# EAGLE board PCB_TGI_V9_2D (EAGLE 9.7.0)
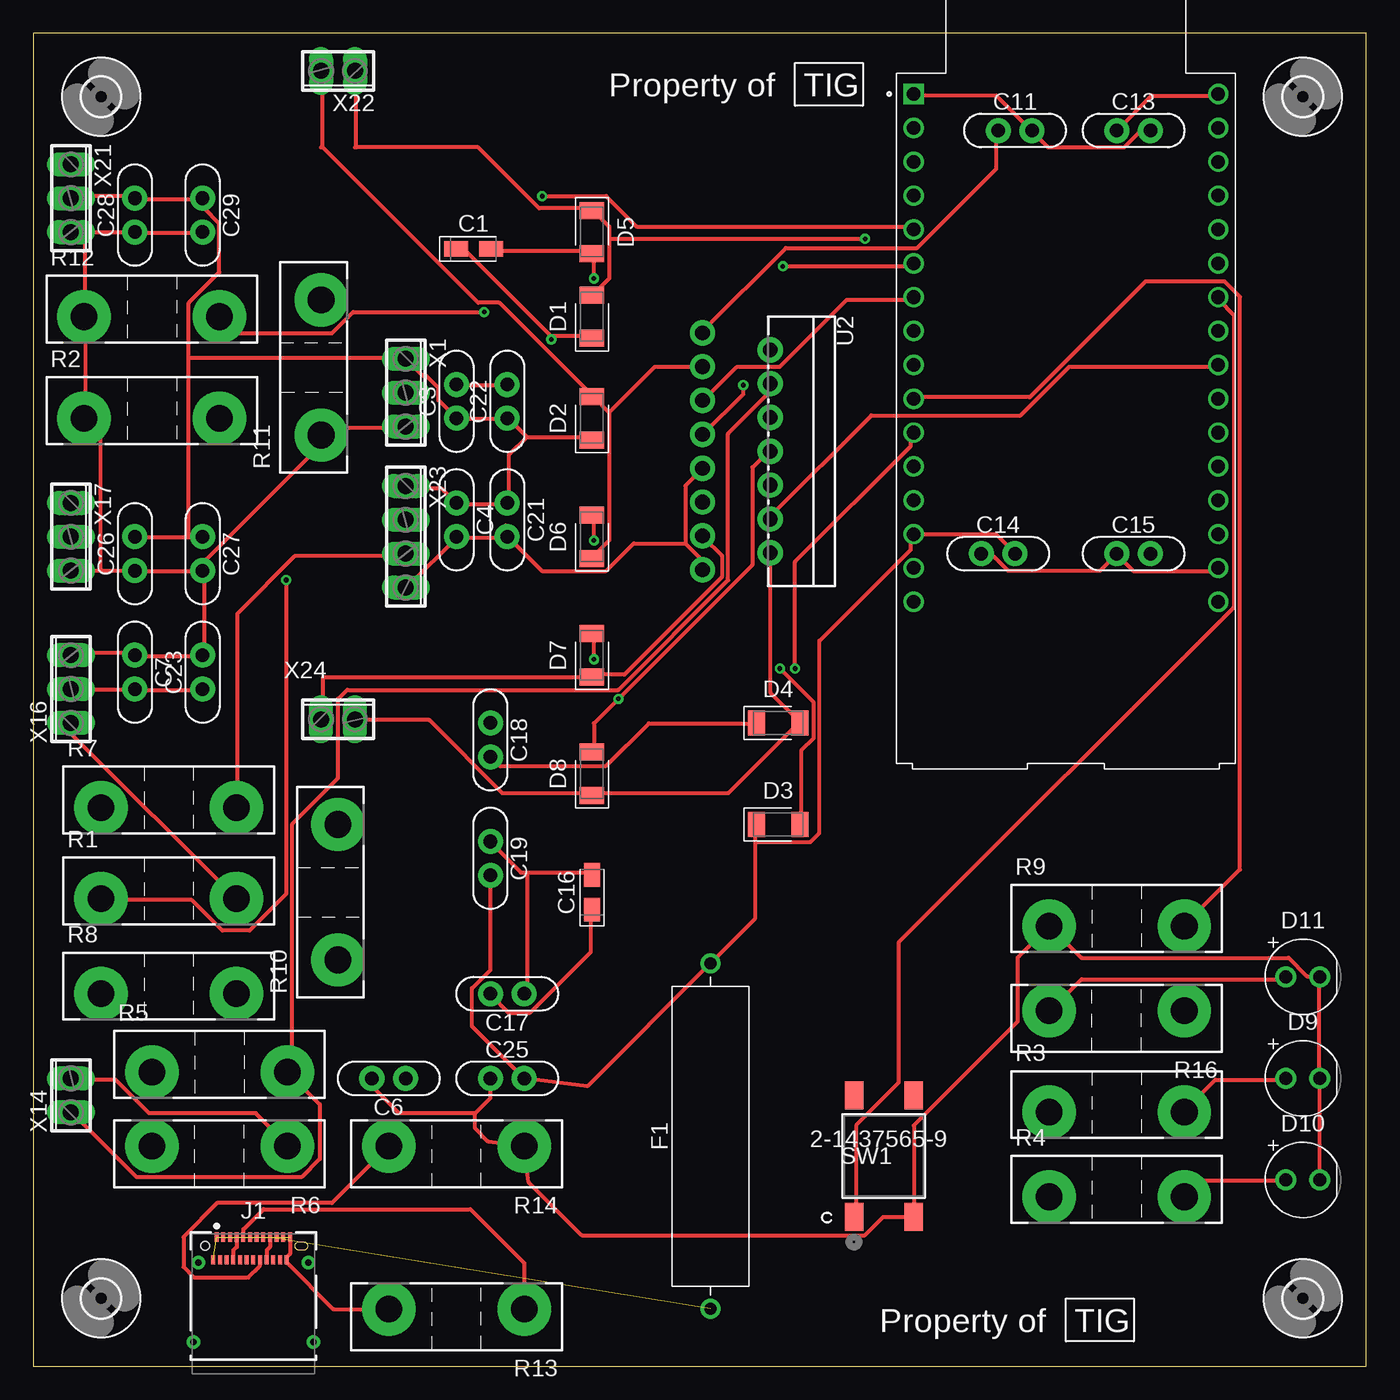
[diagram p0: board, top side]
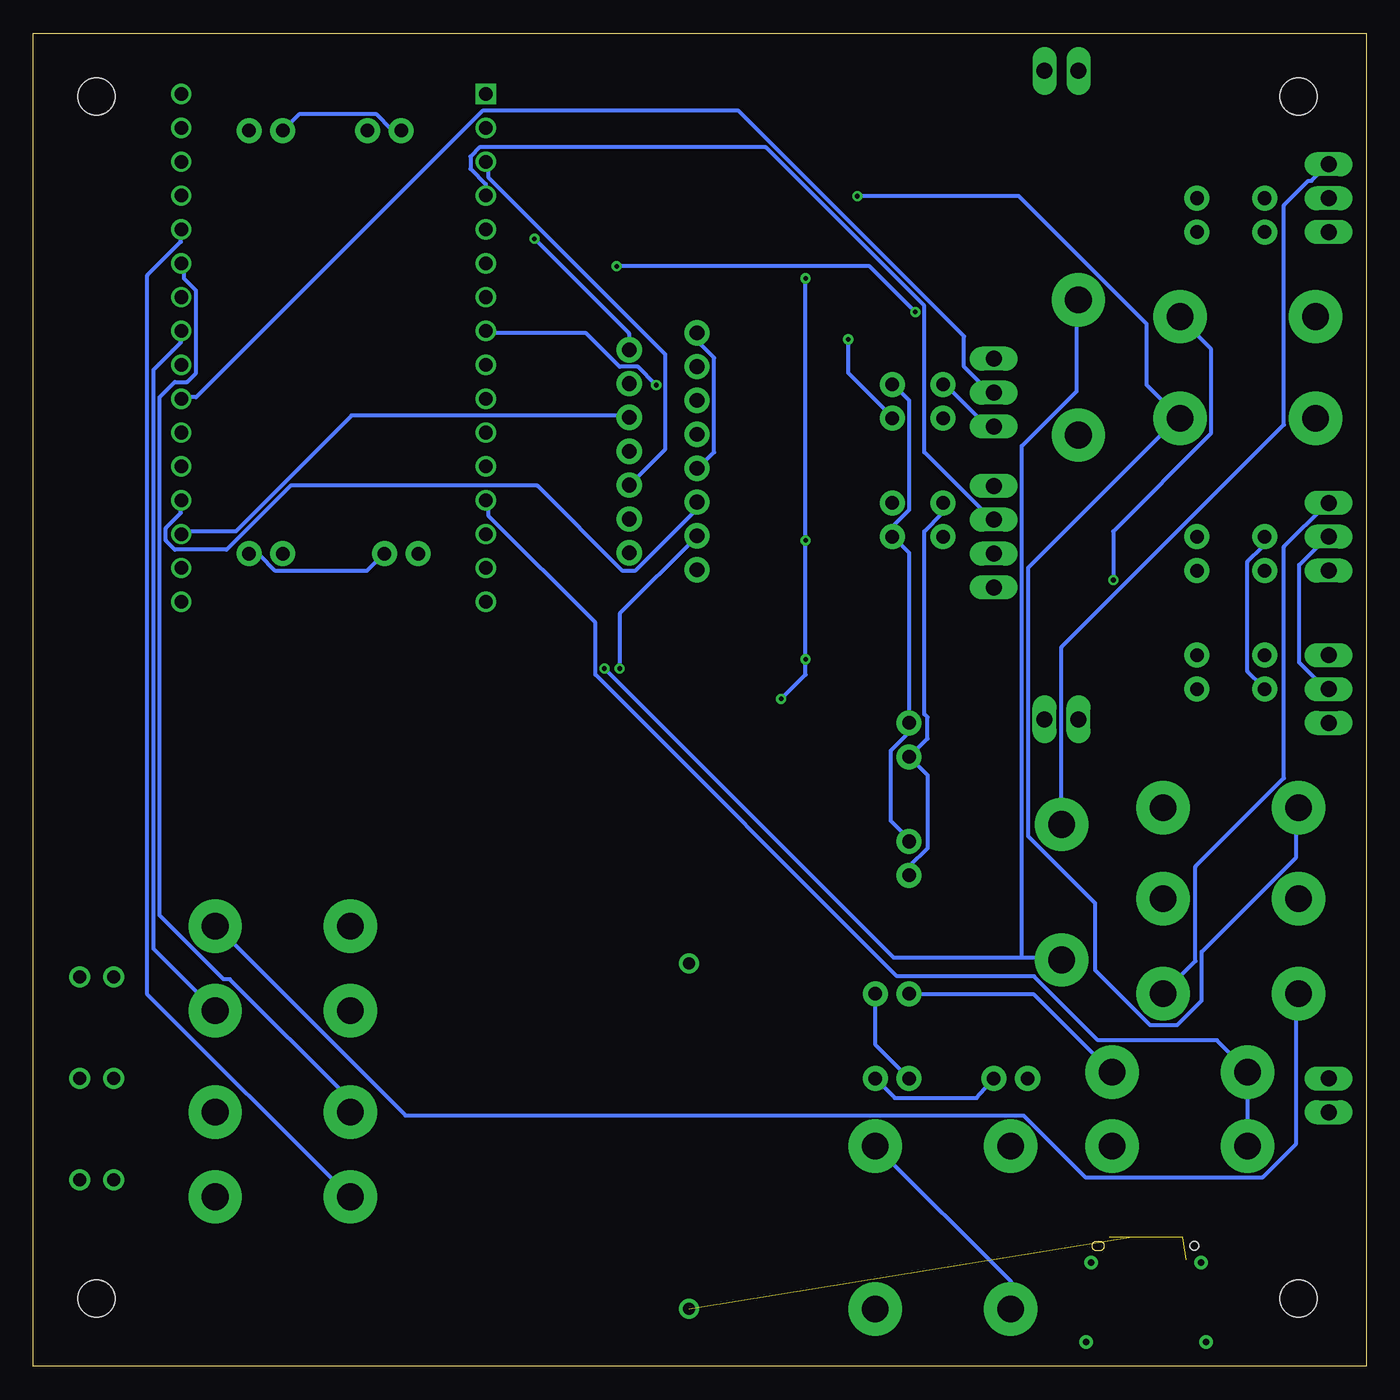
[diagram p1: board, bottom side, seen from below]

Size 100 x 100 mm. Coordinates in mm from the lower left corner, seen from the top.
Outline: 0,0 100,0 100,100 0,100 0,0
Copper layers (1*16): Top / Bottom
Stack-up Default Layer Stack: Top SilkScreen Epoxy Ink / Top SolderMask SR:Green 0.0254mm Dk 4.3 / Top Surface Finish Lead-Free 0.02mm / Top CuFoil:007 0.035mm / Dielectric-1 User Defined 1.5mm / Bottom CuFoil:007 0.035mm / Bottom Surface Finish Lead-Free 0.02mm / Bottom SolderMask SR:Green 0.0254mm Dk 4.3 / Bottom SilkScreen Epoxy Ink
Design rules: minimum copper width 12mil, minimum drill size 0.35mm, copper clearance wire_polygon to wire_polygon 6mil, copper clearance wire_polygon to pad_smd 6mil, copper clearance wire_polygon to via 6mil, copper clearance pad_smd to pad_smd 6mil, copper clearance pad_smd to via 6mil, copper clearance via to via 6mil, copper clearance smd to pad (same net) 6mil, copper clearance smd to via (same net) 6mil, copper clearance smd to smd (same net) 6mil, dimension clearance 40mil, via restrict clearance 0mil, restrict clearance 0mil, drill distance 6mil, keepout clearance 0mil

## Footprints (pad centres in the part's own frame; a part is rotated, then mirrored left to right if it is on the bottom)
CAPMP3216X180N = smd 1.796 x 1.189: 1 -1.31,0; 2 1.31,0
CAP-THRU-2.54MM = drill 1.016 pad 1.88: 1 -1.27,0; 2 1.27,0
DIOMELF3516 = smd 1.275 x 1.85: 1 -1.62,0; 2 1.62,0
LEDRD254W60D565H860B_W = drill 0.981 pad 1.581: 1 -1.27,0; 2 1.27,0
FUSAD2590W70L2150D550B = drill 0.9 pad 1.5: 1 -12.95,0; 2 12.95,0
2,8 = hole 2.8: 0,0
12401832E402A = smd 0.3 x 0.7: A1 -2.75,5; A2 -2.25,5; A3 -1.75,5; A4 -1.25,5; A5 -0.75,5; A6 -0.25,5; A7 0.25,5; A8 0.75,5; A9 1.25,5; A10 1.75,5; A11 2.25,5; A12 2.75,5; B1 2.5,3.3; B2 2,3.3; B3 1.5,3.3; B4 1,3.3; B5 0.5,3.3; B6 0,3.3; B7 -0.5,3.3; B8 -1,3.3; B9 -1.5,3.3; B10 -2,3.3; B11 -2.5,3.3; B12 -3,3.3 | drill 0.5 slot 1.1 rotated 90: SH1 -4.13,3.09; SH2 4.13,3.09; SH3 4.49,-2.86; SH4 -4.49,-2.86 | hole 0.65: -3.6,4.34
TO-247-2V = drill 2 pad 4: 1 -5.08,0; 2 5.08,0
SW4_2-1437565-7 = smd 1.397 x 2.108: 1 -4.46,-9.1; 2 -4.46,0; 3 0,-9.1; 4 0,0
MODULE_ESP32-C6-DEVKITC-1-N8 = drill 1.016 square: J1_1 -11.43,24.325 | drill 1.016: J1_2 -11.43,21.785; J1_3 -11.43,19.245; J1_4 -11.43,16.705; J1_5 -11.43,14.165; J1_6 -11.43,11.625; J1_7 -11.43,9.085; J1_8 -11.43,6.545; J1_9 -11.43,4.005; J1_10 -11.43,1.465; J1_11 -11.43,-1.075; J1_12 -11.43,-3.615; J1_13 -11.43,-6.155; J1_14 -11.43,-8.695; J1_15 -11.43,-11.235; J1_16 -11.43,-13.775; J3_1 11.43,24.325; J3_2 11.43,21.785; J3_3 11.43,19.245; J3_4 11.43,16.705; J3_5 11.43,14.165; J3_6 11.43,11.625; J3_7 11.43,9.085; J3_8 11.43,6.545; J3_9 11.43,4.005; J3_10 11.43,1.465; J3_11 11.43,-1.075; J3_12 11.43,-3.615; J3_13 11.43,-6.155; J3_14 11.43,-8.695; J3_15 11.43,-11.235; J3_16 11.43,-13.775
MULTIWATT15 = drill 1.1 pad 1.9: 1 -8.95,-2.39; 2 -7.68,2.69; 3 -6.41,-2.39; 4 -5.14,2.69; 5 -3.87,-2.39; 6 -2.6,2.69; 7 -1.33,-2.39; 8 -0.06,2.69; 9 1.21,-2.39; 10 2.48,2.69; 11 3.75,-2.39; 12 5.02,2.69; 13 6.29,-2.39; 14 7.56,2.69; 15 8.83,-2.39
3POL254 = drill 1.2 long: 1 -2.54,0; 2 0,0; 3 2.54,0
2POL254 = drill 1.2 long: 1 -1.27,0; 2 1.27,0
4POL254 = drill 1.2 long: 1 -3.81,0; 2 -1.27,0; 3 1.27,0; 4 3.81,0

## Placement (x,y rotation side)
C1  [CAPMP3216X180N]  33.02,83.82 0 top
C3  100 nF  [CAP-THRU-2.54MM]  31.75,72.39 90 top
C4  100 nF  [CAP-THRU-2.54MM]  31.75,63.5 270 top
C6  10µF  [CAP-THRU-2.54MM]  26.67,21.59 180 top
C7  100 nF  [CAP-THRU-2.54MM]  7.62,52.07 270 top
C11  100 nF  [CAP-THRU-2.54MM]  73.66,92.71 0 top
C13  10µF  [CAP-THRU-2.54MM]  82.55,92.71 0 top
C14  100 nF  [CAP-THRU-2.54MM]  72.39,60.96 0 top
C15  10µF  [CAP-THRU-2.54MM]  82.55,60.96 0 top
C16  47µF  [CAPMP3216X180N]  41.91,35.56 90 top
C17  100 nF  [CAP-THRU-2.54MM]  35.56,27.94 180 top
C18  100 nF  [CAP-THRU-2.54MM]  34.29,46.99 270 top
C19  10µF  [CAP-THRU-2.54MM]  34.29,38.1 270 top
C21  10µF  [CAP-THRU-2.54MM]  35.56,63.5 270 top
C22  10µF  [CAP-THRU-2.54MM]  35.56,72.39 90 top
C23  10µF  [CAP-THRU-2.54MM]  12.7,52.07 90 top
C25  100 nF  [CAP-THRU-2.54MM]  35.56,21.59 0 top
C26  100 nF  [CAP-THRU-2.54MM]  7.62,60.96 90 top
C27  10µF  [CAP-THRU-2.54MM]  12.7,60.96 270 top
C28  100 nF  [CAP-THRU-2.54MM]  7.62,86.36 90 top
C29  10µF  [CAP-THRU-2.54MM]  12.7,86.36 270 top
D1  DIODE_LL4148_SOD-80  [DIOMELF3516]  41.91,78.74 90 top
D2  DIODE_LL4148_SOD-80  [DIOMELF3516]  41.91,71.12 90 top
D3  DIODE_LL4148_SOD-80  [DIOMELF3516]  55.88,40.64 0 top
D4  DIODE_LL4148_SOD-80  [DIOMELF3516]  55.88,48.26 0 top
D5  DIODE_LL4148_SOD-80  [DIOMELF3516]  41.91,85.09 270 top
D6  DIODE_LL4148_SOD-80  [DIOMELF3516]  41.91,62.23 90 top
D7  DIODE_LL4148_SOD-80  [DIOMELF3516]  41.91,53.34 90 top
D8  DIODE_LL4148_SOD-80  [DIOMELF3516]  41.91,44.45 90 top
D9  LED_YELLOW  [LEDRD254W60D565H860B_W]  95.25,21.59 0 top
D10  LED_GREEN  [LEDRD254W60D565H860B_W]  95.25,13.97 0 top
D11  LED_RED  [LEDRD254W60D565H860B_W]  95.25,29.21 0 top
F1  FUSE_AXIAL-26MM-PITCH  [FUSAD2590W70L2150D550B]  50.8,17.26 90 top
H1  MOUNT-HOLE2.8  [2,8]  5.08,95.25 0 top
H2  MOUNT-HOLE2.8  [2,8]  95.25,95.25 0 top
H3  MOUNT-HOLE2.8  [2,8]  5.08,5.08 0 top
H4  MOUNT-HOLE2.8  [2,8]  95.25,5.08 0 top
J1  12401832E402A  [12401832E402A]  16.51,4.68 0 top
R1  1.8KΩ  [TO-247-2V]  10.16,35.08 0 top
R2  3.3KΩ  [TO-247-2V]  8.89,71.12 0 top
R3  220Ω  [TO-247-2V]  81.28,19.05 0 top
R4  220Ω  [TO-247-2V]  81.28,12.7 0 top
R5  100KΩ  [TO-247-2V]  13.97,22.07 0 top
R6  33KΩ  [TO-247-2V]  13.97,16.51 180 top
R7  1.8KΩ  [TO-247-2V]  10.16,41.91 0 top
R8  1.8KΩ  [TO-247-2V]  10.16,27.94 0 top
R9  3.3KΩ  [TO-247-2V]  81.28,33.02 0 top
R10  1.8KΩ  [TO-247-2V]  22.86,35.56 90 top
R11  3.3KΩ  [TO-247-2V]  21.59,74.93 90 top
R12  3.3KΩ  [TO-247-2V]  8.89,78.74 0 top
R13  5.1KΩ  [TO-247-2V]  31.75,4.29 180 top
R14  5.1KΩ  [TO-247-2V]  31.75,16.51 180 top
R16  220Ω  [TO-247-2V]  81.28,26.67 180 top
SW1  2-1437565-9  [SW4_2-1437565-7]  66.04,20.32 0 top
U1  ESP32-C6-DEVKITC-1-N8  [MODULE_ESP32-C6-DEVKITC-1-N8]  77.47,71.12 0 top
U2  L298  [MULTIWATT15]  52.6,68.58 270 top
X1  [3POL254]  27.94,73.04 270 top
X14  [2POL254]  2.82,20.32 90 top
X16  [3POL254]  2.82,50.8 90 top
X17  [3POL254]  2.82,62.23 270 top
X21  [3POL254]  2.82,87.63 270 top
X22  [2POL254]  22.86,97.18 180 top
X23  HC GND  [4POL254]  27.94,62.23 270 top
X24  [2POL254]  22.86,48.54 0 top

## Library data of the parts
C1 C16 = Capacitor; CATEGORY_L1: Capacitor; CATEGORY_L2: Tantalum Capacitors; CATEGORY_L3: Polymer Capacitors; PACKAGE: Surface Mount; PACKAGE_SIZE: 1206
C3 C4 C6 C7 C11 C13-C15 C17-C19 C21-C23 C25-C29 = Tinkercad
D1-D8 = Diode; CATEGORY_L1: Diode; CATEGORY_L2: Rectifiers; CATEGORY_L3: Small Signal Switching Diodes; DATASHEET: https://www.onsemi.com/download/data-sheet/pdf/ll4148-d.pdf; DESCRIPTION: Diode 100V 200mA Surface Mount DO-213AA (SOD-80 or MiniMELF); FORWARD_CURRENT: 10mA; FORWARD_VOLTAGE: 1V; MANUFACTURER: onsemi; MPN: LL4148; OPERATING_TEMPERATURE: -55°C ~ 175°C; PACKAGE: Surface Mount; PACKAGE_SIZE: SOD-80; PART_STATUS: Active; REVERSE_VOLTAGE: 100V; ROHS: Compliant; SERIES: LL4148; ZENER_VOLTAGE: NA
D9-D11 = Tinkercad; CATEGORY: Opto-Electronic; SUB-CATEGORY: LED
F1 = Circuit-Protection; CATEGORY_L1: Circuit Protection; CATEGORY_L2: Fuses; CATEGORY_L3: Axial; PACKAGE: Through Hole; PACKAGE_SIZE: 26MM-PITCH
H1-H4 = holes
J1 = Connector_USB; CATEGORY_L1: USB Connector; CATEGORY_L2: USB TYPE-C; CATEGORY_L3: Surface Mount-Right Angle-Through Hole; CONTACTS: 24; CURRENT_RATING: 5A; DATASHEET: https://cdn.amphenol-cs.com/media/wysiwyg/files/documentation/datasheet/inputoutput/io_usb_3_2_type_c.pdf; DESCRIPTION: USB-C (USB TYPE-C) USB 3.2 Gen 2 (USB 3.1 Gen 2- Superspeed + (USB 3.1)) Receptacle Connector 24 Position Surface Mount- Right Angle- Through Hole; GENDER: Receptacle; MANUFACTURER: Amphenol ICC (Commercial Products); MPN: 12401832E402A; OPERATING_TEMPERATURE: -40°C ~ 85°C; PACKAGE: Surface Mount; PACKAGE_SIZE: NA; PART_STATUS: Active; ROHS: Compliant; SERIES: NA; VOLTAGE_RATING: NA
R1-R14 R16 = resistor-power; OC_FARNELL: unknown; OC_NEWARK: unknown
SW1 = Switches; CATEGORY: Tactile Switches; DATASHEET: https://www.te.com/commerce/DocumentDelivery/DDEController?Action=showdoc&DocId=Customer+Drawing%7F2-1437565-7%7FV%7Fpdf%7FEnglish%7FENG_CD_2-1437565-7_V.pdf%7F2-1437565-7; DESCRIPTION: FSM2JSMAATR=TACTILE 260G FORCE; MANUFACTURER_PART_NUMBER: FSM2JSMAATR; PART_STATUS: active; SERIES: Alcoswitch FSMJSMA; VENDOR: TE Connectivity
U1 = ESP32-C6-DEVKITC-1-N8 (1); AVAILABILITY: In Stock; CHECK_PRICES: https://www.snapeda.com/parts/ESP32-C6-DEVKITC-1-N8/Espressif+Systems/view-part/?ref=eda; DESCRIPTION: The ESP32-C6-DEVKITC-1-N8 from Espressif Systems is a development board designed for RF, RFID, and wireless applications. Built around the ESP32-C6-WROOM-1 module, it supports multiple connectivity options including 802.11 b/g/n/ax Wi-Fi, Bluetooth® (BLE), and 802.15.4 for Thread and Zigbee® protocols. The board is powered by the ESP32-C6 chip with 8MB SPI flash, offering advanced processing power and efficient memory management. It features GPIO ports for extensive interfacing, along with a USB Type-C™ to UART port for power and communication. The board also includes a USB-to-UART bridge, pin header, and boot/reset buttons, operating at 3.3V with a 5V to 3.3V power regulator. This development board is ideal for exploring a wide range of wireless applications, including IoT, smart home devices, and RF communication projects.; MF: Espressif Systems; MP: ESP32-C6-DEVKITC-1-N8; PACKAGE: None; PRICE: None; SNAPEDA_LINK: https://www.snapeda.com/parts/ESP32-C6-DEVKITC-1-N8/Espressif+Systems/view-part/?ref=snap
U2 = SparkFun-IC-Special-Function
X1 X14 X16 X17 X21-X24 = con-phoenix-254; OC_FARNELL: unknown; OC_NEWARK: unknown

## Nets
5V: C1.1 C3.1 C4.1 C6.1 C7.2 C14.2 C15.2 C18.2 C19.2 C21.1 C22.1 C23.1 C25.2 C26.2 C27.1 C28.2 C29.1 D1.1 D2.1 D3.1 D4.1 F1.2 U1.J1_14 X1.1 X16.2 X17.2 X21.2 X23.1
8.4V: C16.1 C17.2 R5.2 U2.4 X14.1
GND: C3.2 C4.2 C6.2 C7.1 C11.1 C13.1 C16.2 C17.1 C18.1 C19.1 C21.2 C22.2 C23.2 C25.1 C26.1 C27.2 C28.1 C29.2 D9.2 D10.2 D11.2 J1.A1 J1.A12 J1.B1 J1.B12 R2.1 R9.1 R11.1 R12.1 R13.2 R14.1 SW1.3 U1.J3_1 U2.1 U2.9 U2.15 X1.3 X16.3 X17.3 X21.3 X23.4
GND_J1_15: U1.J1_15
GND_J3_12: U1.J3_12
GNDBT: R6.1 X14.2
GPIO-12: U1.J3_9 U2.12
GPIO-21: U1.J1_3 U2.10
N$1: D1.2 D5.1 U2.2 X22.1
N$2: D2.2 D6.1 U2.3 X22.2
N$3: D3.2 D7.1 U2.13 X24.1
N$4: D4.2 D8.1 U2.14 X24.2
N$5: R1.2 X16.1
N$6: U1.J3_3
N$7: R2.2 R7.1 U1.J1_5
N$8: U1.J3_14 U2.6
N$9: R10.1 R11.2 U1.J1_11
N$10: R8.1 R9.2 U1.J1_10
N$11: R5.1 R6.2 U1.J1_13
N$12: R10.2 X21.1
N$13: F1.1 J1.A4 J1.A9 J1.B4 J1.B9
N$14: U1.J1_4 X23.2
N$15: U1.J1_7 U2.5
N$16: U1.J1_8 U2.7
N$17: D11.1 R16.2
N$18: R7.2 X23.3
N$19: U1.J3_10 X1.2
N$20: U1.J3_13 U2.11
N$21: C1.2 D5.2 D6.2 D7.2 D8.2 U2.8
N$23: D9.1 R3.2
N$24: D10.1 R4.2
N$25: J1.A5 R13.1
N$26: R1.1 R12.2 U1.J1_6
N$27: C11.2 C13.2 U1.J1_1
N$28: R8.2 X17.1
N$31: C14.1 C15.1 U1.J3_15
N$36: J1.B5 R14.2
N$39: R4.1 U1.J3_5
N$40: R3.1 U1.J3_6
N$41: R16.1 U1.J3_8
N$42: SW1.1 U1.J3_7
N$43: U1.J1_9

## Tracks (layer width: path | path; a pad name or v marks a point on that pad's centre or on a via)
5V  (via drill 0.35)
  Top 0.305: 38.86,77.27 32.46,83.67 31.77,83.67 C1.1 | 38.86,77.27 41.83,77.27 D1.1 | X23.1 28.12,65.84 30.63,65.84 31.55,64.92 C4.1 31.77,64.69 35.43,64.69 C21.1 35.66,64.92 35.66,68.35 37.03,69.72 | 37.03,69.72 41.83,69.72 D2.1 | 37.03,69.72 35.66,71.09 C22.1 35.43,71.09 31.77,71.09 C3.1 30.4,72.47 30.4,73.38 29.49,74.3 29.26,74.3 28.12,75.44 X1.1 27.89,75.67 11.66,75.67 | v38.86,77.04 38.86,77.27 | X21.2 2.97,87.78 7.54,87.78 C28.2 7.77,87.55 12.57,87.55 C29.1 12.8,87.55 12.8,86.87 13.95,85.72 13.95,82.07 11.66,79.78 11.66,75.67 | 11.66,62.18 12.57,62.18 C27.1 | 11.66,62.18 7.77,62.18 C26.2 | X16.2 2.97,50.75 7.54,50.75 C7.2 7.77,50.75 12.57,50.75 C23.1 | 11.66,62.18 11.66,75.67 | C18.2 34.98,45.03 42.98,45.03 46.18,48.23 54.18,48.23 D4.1 | C14.2 73.61,61.04 72.24,62.41 66.06,62.41 U1.J1_14 65.84,62.41 65.84,61.27 58.98,54.41 58.98,40.01 58.29,39.32 54.18,39.32 | 54.18,39.32 54.18,33.6 50.98,30.4 F1.2 50.75,30.18 41.57,21 C25.2 32.92,25.5 32.92,28.35 34.29,29.72 C19.2 | 54.18,39.32 54.18,40.46 D3.1
  Bottom 0.305: v38.86,77.04 38.86,74.52 35.66,71.32 C22.1 | X17.2 2.97,62.18 5.03,60.12 5.03,52.81 2.97,50.75 X16.2 | C26.2 7.77,62.18 7.77,61.49 8.91,60.35 8.91,52.12 7.77,50.98 C7.2 | C19.2 34.29,37.49 32.92,38.86 32.92,44.35 C18.2 32.92,47.09 32.92,48.69 33.15,48.92 33.15,62.64 31.77,64.01 31.77,64.69 C4.1 | C15.2 83.67,60.81 82.98,60.81 81.84,59.66 74.98,59.66 73.84,60.81 C14.2 | C6.1 29.23,20.12 35.36,20.12 C25.2
8.4V
  Top 0.305: C16.1 41.83,34.06 41.83,31.09 37.26,26.52 35.66,26.52 34.29,27.89 C17.2 | X14.1 2.97,18.97 7.77,14.17 20.12,14.17 21.49,15.54 21.49,19.66 19.2,21.95 R5.2 19.2,22.17 19.43,22.4 19.43,40.69 22.86,44.12 22.86,50.06 23.55,50.75 43.89,50.75 52.12,58.98 52.12,69.95 55.09,72.92 55.09,73.61 U2.4
  Bottom 0.305: C17.2 34.29,27.89 24.92,27.89 19.2,22.17 R5.2
GND  (2 unrouted)
  Top 0.305: 37.03,37.03 36.58,37.03 34.29,39.32 C19.1 34.29,39.55 | 37.03,37.03 41.83,37.03 C16.2 | 37.03,37.03 37.03,28.12 C17.1 36.8,27.89 | 33.15,18.97 27.43,18.97 25.4,21.01 C6.2 | 33.15,18.97 34.29,20.12 C25.1 | 33.15,18.97 33.15,17.83 34.13,16.85 R14.1 37.17,13.81 41.15,9.83 62.41,9.83 63.78,11.2 65.84,11.2 SW1.3 66.06,11.43 66.06,18.06 73.84,25.83 73.84,30.63 76.12,32.92 R9.1 76.35,32.92 78.64,30.63 94.18,30.63 95.56,29.26 96.47,29.26 D11.2 96.47,29.03 96.47,21.72 D9.2 96.47,21.49 96.47,14.17 D10.2 | 5.03,59.66 7.54,59.66 C26.1 7.77,59.66 12.57,59.66 C27.2 | 5.03,59.66 2.97,59.66 X17.3 | 3.89,85.04 7.54,85.04 C28.1 7.77,85.04 12.57,85.04 C29.2 | 3.89,85.04 2.97,85.04 X21.3 3.89,85.04 | 3.89,85.04 3.89,78.87 R12.1 3.89,78.64 3.89,71.32 R2.1 | 5.03,69.95 5.03,59.66 | 5.03,69.95 3.89,71.09 R2.1 | 50.06,60.58 50.06,59.89 U2.15 50.06,60.58 | 48.92,61.72 50.06,60.58 | 48.92,61.72 48.92,66.06 50.06,67.21 U2.9 50.06,67.44 | 31.77,62.18 28.12,58.52 X23.4 | 31.77,62.18 35.43,62.18 C21.2 | 22.17,70.41 27.89,70.41 X1.3 28.57,70.64 | 22.17,70.41 21.72,69.95 R11.1 | 48.92,61.72 45.03,61.72 42.98,59.66 38.18,59.66 35.66,62.18 C21.2 | 12.8,60.35 12.8,59.89 C27.2 | 21.49,69.04 12.8,60.35 | 21.49,69.04 21.49,69.72 R11.1 | J1.A12 19.26,8.43 19.01,8.18 J1.B1 19.01,7.78 22.5,4.29 R13.2 26.67,5.08 | 50.06,76.81 U2.1 50.29,77.72 56.46,83.9 66.29,83.9 72.24,89.84 72.24,92.58 C11.1 73.15,92.81 | 34.29,47.55 C18.1 | U1.J3_1 88.7,95.33 83.9,95.33 C13.1 81.15,92.81 | 35.43,63.09 C21.2 | C4.2 31.77,62.18 | C22.2 35.43,73.61 31.77,73.61 C3.2 31.55,73.61 | X16.3 2.97,53.49 7.54,53.49 C7.1 7.77,53.26 12.57,53.26 C23.2 12.8,53.49 12.8,59.66 C27.2
  Top 0.305: 12.8,60.35 C27.2 | R2.1 5.03,69.95 | R11.1 22.17,70.41 | R11.1 21.49,69.04
  Bottom 0.305: C19.1 34.29,39.55 35.66,40.92 35.66,46.18 34.29,47.55 C18.1 34.29,61.04 35.43,62.18 C21.2 35.43,62.41 35.43,63.09 34.29,64.24 34.29,72.47 35.43,73.61 C22.2 | C17.1 36.8,27.89 36.8,24.11 C25.1 | C11.1 72.47,92.81 73.15,92.81 74.3,93.95 80.01,93.95 81.15,92.81 C13.1 | U2.1 50.06,77.5 50.06,76.81 48.92,75.67 48.92,68.58 50.06,67.44 U2.9 | X1.3 28.12,70.64 28.57,70.64 31.55,73.61 C3.2 | R14.1 26.67,6.35 R13.2
GNDBT
  Top 0.305: X14.2 2.97,21.49 6.17,21.49 8.69,18.97 16.69,18.97 18.97,16.69 R6.1
GPIO-12
  Top 0.305: U1.J3_9 88.7,74.98 77.72,74.98 74.07,71.32 62.87,71.32 55.32,63.78 U2.12
GPIO-21
  Bottom 0.305: U1.J1_3 65.84,90.3 65.84,89.15 52.58,75.89 52.58,68.81 55.09,66.29 U2.10
N$1  (via drill 0.35)
  Top 0.305: 24.23,91.44 24.23,97.16 X22.1 | 43.2,84.58 43.2,85.5 42.06,86.64 D5.1 41.83,86.87 37.95,86.87 33.38,91.44 24.23,91.44 | 43.2,84.58 43.2,81.61 42.06,80.47 D1.2 | 43.2,84.58 v62.41,84.58 | 24.23,91.44 24.13,91.44
  Bottom 0.305: v62.41,84.58 55.32,77.5 55.32,76.35 U2.2
N$2
  Top 0.305: 21.72,91.44 21.72,97.16 X22.2 | 43.2,71.55 43.2,61.95 42.06,60.81 D6.1 | 43.2,71.55 42.06,72.69 D2.2 41.83,72.92 34.98,79.78 33.38,79.78 21.72,91.44 | 43.2,71.55 46.63,74.98 50.06,74.98 U2.3 | 21.72,91.44 21.59,91.44
N$3  (via drill 0.35)
  Top 0.305: X24.1 21.72,48.69 21.72,51.66 41.83,51.66 D7.1 42.06,51.89 44.35,51.89 51.66,59.21 51.66,60.81 50.29,62.18 U2.13 | v56.01,52.35 58.52,49.84 58.52,47.09 57.61,46.18 57.61,40.69 D3.2
  Bottom 0.305: v56.01,52.35 56.01,56.46 50.29,62.18 U2.13
N$4
  Top 0.305: U2.14 55.32,60.81 55.32,50.52 57.38,48.46 D4.2 57.38,48.23 52.12,42.98 42.06,42.98 D8.1 41.83,42.98 35.2,42.98 29.72,48.46 24.23,48.46 X24.2
N$5
  Top 0.305: X16.1 2.97,48.23 2.97,47.32 15.09,35.2 R1.2
N$7  (via drill 0.35)
  Top 0.305: v38.18,87.78 42.98,87.78 45.26,85.5 65.84,85.5 U1.J1_5
  Bottom 0.305: v38.18,87.78 26.06,87.78 16.46,78.18 16.46,73.61 R2.2 14.17,71.09 25.38,59.89 25.38,39.78 20.34,34.75 20.34,29.72 16.23,25.6 14.17,25.6 12.34,27.43 12.34,31.09 5.26,38.18 5.26,41.83 R7.1
N$8
  Bottom 0.305: U1.J3_14 88.7,62.64 84.81,62.64 76.12,71.32 55.32,71.32 U2.6
N$9  (via drill 0.35)
  Top 0.305: v57.15,52.35 57.15,60.35 65.84,69.04 65.84,69.95 U1.J1_11
  Bottom 0.305: v57.15,52.35 35.43,30.63 25.83,30.63 | 25.83,30.63 22.86,30.63 R10.1 | 25.83,30.63 25.83,69.04 21.72,73.15 21.72,80.01 R11.2
N$10
  Top 0.305: U1.J1_10 66.06,72.69 74.75,72.69 83.44,81.38 89.38,81.38 90.53,80.24 90.53,37.26 86.41,33.15 R9.2
  Bottom 0.305: R8.1 5.26,27.89 5.26,16.69 7.77,14.17 21.07,14.17 25.71,18.82 72.08,18.82 86.18,32.92 R9.2
N$11
  Bottom 0.305: U1.J1_13 65.84,64.92 65.84,63.78 57.84,55.78 57.84,51.89 35.2,29.26 24.92,29.26 20.12,24.46 11.2,24.46 8.91,22.17 R5.1 8.91,21.95 8.91,16.69 R6.2
N$12
  Bottom 0.305: R10.2 22.86,53.95 6.17,70.64 6.17,87.1 4.34,88.92 4.12,88.92 2.97,90.07 X21.1
N$13  (2 unrouted)
  Top 0.305: J1.A9 17.76,8.96 17.51,8.71 J1.B4 | J1.A4 15.26,8.96 15.01,8.71 J1.B9
N$14
  Bottom 0.305: U1.J1_4 66.06,88.01 66.06,88.7 67.21,89.84 67.21,90.75 66.52,91.44 45.03,91.44 33.15,79.55 33.15,68.58 28.12,63.55 X23.2
N$15
  Top 0.305: U1.J1_7 65.84,80.01 61.04,80.01 56.01,74.98 52.81,74.98 50.29,72.47 U2.5
N$16  (via drill 0.35)
  Top 0.305: v53.26,73.61 53.26,72.92 50.29,69.95 U2.7
  Bottom 0.305: v53.26,73.61 54.63,74.98 56.01,74.98 58.52,77.5 65.84,77.5 U1.J1_8
N$17
  Top 0.305: D11.1 93.95,29.03 78.64,29.03 76.35,26.75 R16.2
N$18
  Top 0.305: X23.3 27.89,60.81 19.66,60.81 15.32,56.46 15.32,42.06 R7.2
N$19
  Bottom 0.305: U1.J3_10 88.7,72.69 87.78,72.69 66.29,94.18 47.09,94.18 30.18,77.27 30.18,74.98 28.12,72.92 X1.2
N$20
  Bottom 0.305: U1.J3_13 88.92,64.92 88.92,64.01 90.07,62.87 90.07,61.95 89.38,61.27 85.5,61.27 80.7,66.06 62.18,66.06 55.78,59.66 54.86,59.66 50.29,64.24 50.29,64.69 U2.11
N$21  (via drill 0.35)
  Top 0.305: C1.2 34.52,83.67 41.83,83.67 D5.2 42.06,83.44 v42.06,81.61 | D8.2 42.06,46.18 42.06,48.23 v43.89,50.06 53.95,60.12 53.95,67.44 55.09,68.58 U2.8 | v42.06,53.03 42.06,54.86 D7.2 | v42.06,61.95 42.06,63.78 D6.2
  Bottom 0.305: v43.89,50.06 42.06,51.89 v42.06,53.03 v42.06,61.95 v42.06,81.61
N$23
  Top 0.305: D9.1 93.95,21.49 88.7,21.49 86.41,19.2 R3.2
N$24
  Top 0.305: D10.1 93.95,13.95 87.55,13.95 86.41,12.8 R4.2
N$25
  Top 0.305: J1.A5 15.77,9.83 15.77,10.29 17.27,11.79 32.79,11.79 36.83,7.75 R13.1
N$26  (via drill 0.35)
  Top 0.305: v56.24,82.53 65.84,82.53 U1.J1_6 | v33.83,79.1 24,79.1 22.4,77.5 15.32,77.5 14.17,78.64 R12.2 | v18.97,58.98 18.97,35.43 16.23,32.69 14.17,32.69 11.89,34.98 5.26,34.98 R1.1
  Bottom 0.305: v56.24,82.53 37.26,82.53 v33.83,79.1 | v18.97,58.98 18.97,62.64 11.66,69.95 11.66,76.35 13.95,78.64 R12.2
N$27
  Top 0.305: U1.J1_1 66.06,95.33 72.24,95.33 74.75,92.81 C11.2 74.98,92.58 76.12,91.44 81.84,91.44 82.98,92.58 83.67,92.58 C13.2
N$28
  Bottom 0.305: X17.1 2.97,64.69 6.17,61.49 6.17,44.12 12.8,37.49 12.8,30.4 15.09,28.12 R8.2
N$31
  Top 0.305: U1.J3_15 88.7,59.66 82.53,59.66 81.38,60.81 C15.1 81.15,60.81 80.01,59.66 73.15,59.66 72.01,60.81 71.32,60.81 C14.1
N$36
  Top 0.305: R14.2 22.4,12.24 13.81,12.24 11.26,9.7 11.26,7.44 12.04,6.66 16.12,6.66 17.01,7.55 J1.B5
N$39
  Bottom 0.305: U1.J3_5 88.92,85.27 88.92,84.35 91.44,81.84 91.44,27.89 76.35,12.8 R4.1
N$40
  Bottom 0.305: U1.J3_6 88.7,82.53 88.7,81.61 87.78,80.7 87.78,74.52 88.47,73.84 89.38,73.84 90.53,72.69 90.53,33.83 85.72,29.03 85.27,29.03 76.35,20.12 76.35,19.2 R3.1
N$41
  Bottom 0.305: U1.J3_8 88.92,77.5 88.92,76.81 90.98,74.75 90.98,31.32 86.41,26.75 R16.1
N$42
  Top 0.305: SW1.1 61.72,11.43 61.72,18.06 64.92,21.26 64.92,31.77 90.07,56.92 90.07,78.87 88.92,80.01 U1.J3_7

## Text on the board
SilkscreenTop: Property of TIG | Property of TIG